# EAGLE board CT_schematic (EAGLE 7.6.0)

Size 100 x 80 mm. Coordinates in mm from the lower left corner, seen from the top.
Outline: 0,0 100,0 100,80 0,80 0,0
Copper layers (1*16): Top 0.035mm / dielectric 1.5mm / Bottom 0.035mm
Design rules "default": minimum track width 10mil, minimum drill 24mil, track to track 8mil, track to pad 8mil, pad to pad 8mil, via to via 8mil, smd to smd 8mil, copper to edge 40mil, drill to drill 8mil, minimum pad ring 10mil, minimum via ring 8mil, stop-mask expansion 4mil, vias tented up to drill 0mil, thermal gap 10mil

## Footprints (pad centres in the part's own frame; a part is rotated, then mirrored left to right if it is on the bottom)
C0603 = smd 0.8 x 0.8: 1 -0.762,0; 2 0.762,0
C0402 = smd 0.5 x 0.5: 1 -0.508,0; 2 0.508,0
C1206 = smd 1.3 x 1.6: 1 -1.524,0; 2 1.524,0
C0805 = smd 1.2 x 1.3: 1 -1.016,0; 2 1.016,0
2220 = smd 1.85 x 5.5: 1 -2.55,0; 2 2.55,0
C1210 = smd 1.2 x 2.5: 1 -1.524,0; 2 1.524,0
R0603 = smd 0.8 x 0.8: 1 -0.762,0; 2 0.762,0
EXV-9H = smd 3.505 x 1.676: 1 -2.857,0; 2 2.857,0
L0603 = smd 0.8 x 0.8: 1 -0.762,0; 2 0.762,0
WE-HCI_7030/7040/7050 = smd 2.5 x 3: 1 -2.45,0; 2 2.45,0
PJ-037B_PACKAGE = drill 3.7 square: 1 12,0 | drill 3.2 square: 2 6,0
TFBGA216 = smd 0.4 x 0.4: A1 -5.6,5.6; A2 -4.8,5.6; A3 -4,5.6; A4 -3.2,5.6; A5 -2.4,5.6; A6 -1.6,5.6; A7 -0.8,5.6; A8 0,5.6; A9 0.8,5.6; A10 1.6,5.6; A11 2.4,5.6; A12 3.2,5.6; A13 4,5.6; A14 4.8,5.6; A15 5.6,5.6; B1 -5.6,4.8; B2 -4.8,4.8; B3 -4,4.8; B4 -3.2,4.8; B5 -2.4,4.8; B6 -1.6,4.8; B7 -0.8,4.8; B8 0,4.8; B9 0.8,4.8; B10 1.6,4.8; B11 2.4,4.8; B12 3.2,4.8; B13 4,4.8; B14 4.8,4.8; B15 5.6,4.8; C1 -5.6,4; C2 -4.8,4; C3 -4,4; C4 -3.2,4; C5 -2.4,4; C6 -1.6,4; C7 -0.8,4; C8 0,4; C9 0.8,4; C10 1.6,4; C11 2.4,4; C12 3.2,4; C13 4,4; C14 4.8,4; C15 5.6,4; D1 -5.6,3.2; D2 -4.8,3.2; D3 -4,3.2; D4 -3.2,3.2; D5 -2.4,3.2; D6 -1.6,3.2; D7 -0.8,3.2; D8 0,3.2; D9 0.8,3.2; D10 1.6,3.2; D11 2.4,3.2; D12 3.2,3.2; D13 4,3.2; D14 4.8,3.2; D15 5.6,3.2; E1 -5.6,2.4; E2 -4.8,2.4; E3 -4,2.4; E4 -3.2,2.4; E5 -2.4,2.4; E6 -1.6,2.4; E7 -0.8,2.4; E8 0,2.4; E9 0.8,2.4; E10 1.6,2.4; E11 2.4,2.4; E12 3.2,2.4; E13 4,2.4; E14 4.8,2.4; E15 5.6,2.4; F1 -5.6,1.6; F2 -4.8,1.6; F3 -4,1.6; F4 -3.2,1.6; F5 -2.4,1.6; F6 -1.6,1.6; F7 -0.8,1.6; F8 0,1.6; F9 0.8,1.6; F10 1.6,1.6; F11 2.4,1.6; F12 3.2,1.6; F13 4,1.6; F14 4.8,1.6; F15 5.6,1.6; G1 -5.6,0.8; G2 -4.8,0.8; G3 -4,0.8; G4 -3.2,0.8; G5 -2.4,0.8; G6 -1.6,0.8; G10 1.6,0.8; G11 2.4,0.8; G12 3.2,0.8; G13 4,0.8; G14 4.8,0.8; G15 5.6,0.8; H1 -5.6,0; H2 -4.8,0; H3 -4,0; H4 -3.2,0; H5 -2.4,0; H6 -1.6,0; H10 1.6,0; H11 2.4,0; H12 3.2,0; H13 4,0; H14 4.8,0; H15 5.6,0; J1 -5.6,-0.8; J2 -4.8,-0.8; J3 -4,-0.8; J4 -3.2,-0.8; J5 -2.4,-0.8; J6 -1.6,-0.8; J10 1.6,-0.8; J11 2.4,-0.8; J12 3.2,-0.8; J13 4,-0.8; J14 4.8,-0.8; J15 5.6,-0.8; K1 -5.6,-1.6; K2 -4.8,-1.6; K3 -4,-1.6; K4 -3.2,-1.6; K5 -2.4,-1.6; K6 -1.6,-1.6; K7 -0.8,-1.6; K8 0,-1.6; K9 0.8,-1.6; K10 1.6,-1.6; K11 2.4,-1.6; K12 3.2,-1.6; K13 4,-1.6; K14 4.8,-1.6; K15 5.6,-1.6; L1 -5.6,-2.4; L2 -4.8,-2.4; L3 -4,-2.4; L4 -3.2,-2.4; L5 -2.4,-2.4; L6 -1.6,-2.4; L7 -0.8,-2.4; L8 0,-2.4; L9 0.8,-2.4; L10 1.6,-2.4; L11 2.4,-2.4; L12 3.2,-2.4; L13 4,-2.4; L14 4.8,-2.4; L15 5.6,-2.4; M1 -5.6,-3.2; M2 -4.8,-3.2; M3 -4,-3.2; M4 -3.2,-3.2; M5 -2.4,-3.2; M6 -1.6,-3.2; M7 -0.8,-3.2; M8 0,-3.2; M9 0.8,-3.2; M10 1.6,-3.2; M11 2.4,-3.2; M12 3.2,-3.2; M13 4,-3.2; M14 4.8,-3.2; M15 5.6,-3.2; N1 -5.6,-4; N2 -4.8,-4; N3 -4,-4; N4 -3.2,-4; N5 -2.4,-4; N6 -1.6,-4; N7 -0.8,-4; N8 0,-4; N9 0.8,-4; N10 1.6,-4; N11 2.4,-4; N12 3.2,-4; N13 4,-4; N14 4.8,-4; N15 5.6,-4; P1 -5.6,-4.8; P2 -4.8,-4.8; P3 -4,-4.8; P4 -3.2,-4.8; P5 -2.4,-4.8; P6 -1.6,-4.8; P7 -0.8,-4.8; P8 0,-4.8; P9 0.8,-4.8; P10 1.6,-4.8; P11 2.4,-4.8; P12 3.2,-4.8; P13 4,-4.8; P14 4.8,-4.8; P15 5.6,-4.8; R1 -5.6,-5.6; R2 -4.8,-5.6; R3 -4,-5.6; R4 -3.2,-5.6; R5 -2.4,-5.6; R6 -1.6,-5.6; R7 -0.8,-5.6; R8 0,-5.6; R9 0.8,-5.6; R10 1.6,-5.6; R11 2.4,-5.6; R12 3.2,-5.6; R13 4,-5.6; R14 4.8,-5.6; R15 5.6,-5.6
SOIC-8 = smd 1.6 x 0.6: 1 -2.7,1.905 | smd 1.55 x 0.6: 2 -2.7,0.635; 3 -2.7,-0.635; 4 -2.7,-1.905; 5 2.7,-1.905; 6 2.7,-0.635; 7 2.7,0.635; 8 2.7,1.905
IS61WV102416BLL-10MLI = smd 0.4 x 0.4: A1 0,0; A2 0.75,0; A3 1.5,0; A4 2.25,0; A5 3,0; A6 3.75,0; B1 0,-0.75; B2 0.75,-0.75; B3 1.5,-0.75; B4 2.25,-0.75; B5 3,-0.75; B6 3.75,-0.75; C1 0,-1.5; C2 0.75,-1.5; C3 1.5,-1.5; C4 2.25,-1.5; C5 3,-1.5; C6 3.75,-1.5; D1 0,-2.25; D2 0.75,-2.25; D3 1.5,-2.25; D4 2.25,-2.25; D5 3,-2.25; D6 3.75,-2.25; E1 0,-3; E2 0.75,-3; E3 1.5,-3; E4 2.25,-3; E5 3,-3; E6 3.75,-3; F1 0,-3.75; F2 0.75,-3.75; F3 1.5,-3.75; F4 2.25,-3.75; F5 3,-3.75; F6 3.75,-3.75; G1 0,-4.5; G2 0.75,-4.5; G3 1.5,-4.5; G4 2.25,-4.5; G5 3,-4.5; G6 3.75,-4.5; H1 0,-5.25; H2 0.75,-5.25; H3 1.5,-5.25; H4 2.25,-5.25; H5 3,-5.25; H6 3.75,-5.25
SOT-23-8 = smd 0.4 x 1.2: 1 -0.975,-1.3; 2 -0.325,-1.3; 3 0.325,-1.3; 4 0.975,-1.3; 5 0.975,1.3; 6 0.325,1.3; 7 -0.325,1.3; 8 -0.975,1.3
182-009-MALE = drill 1.194 pad 1.524 octagon: 1 -5.537,10.923; 2 -2.769,10.923; 3 0,10.923; 4 2.769,10.923; 5 5.537,10.923; 6 -4.153,8.08; 7 -1.384,8.08; 8 1.384,8.08; 9 4.153,8.08 | hole 3.048: -12.446,9.501; 12.446,9.501
ABS07-32.768KHZ-7-T = smd 1.1 x 2.4: 1 -2.5,0; 2 0,0
ASFL1 = smd 1.7 x 1.5: 1 -1.27,-1.1; 2 1.27,-1.1; 3 1.27,1.1; 4 -1.27,1.1
WSON-8 = smd 0.3 x 0.6: 1 -0.75,0; 2 0.05,0; 3 0.85,0; 4 1.65,0; 5 1.65,3.8; 6 0.85,3.8; 7 0.05,3.8; 8 -0.75,3.8 | smd 3 x 2.6: PAD 0.45,1.9
QFN-16_EP = smd 0.805 x 0.3: 1 -1.452,0.75; 2 -1.452,0.25; 3 -1.452,-0.25; 4 -1.452,-0.75; 9 1.452,-0.75; 10 1.452,-0.25; 11 1.452,0.25; 12 1.452,0.75 | smd 0.3 x 0.805: 5 -0.75,-1.452; 6 -0.25,-1.452; 7 0.25,-1.452; 8 0.75,-1.452; 13 0.75,1.452; 14 0.25,1.452; 15 -0.25,1.452; 16 -0.75,1.452 | smd 1.55 x 1.55: 17 0,0
QFN-38_UHF = smd 0.75 x 0.3: 1 -2.4,2.75; 2 -2.4,2.25; 3 -2.4,1.75; 4 -2.4,1.25; 6 -2.4,0.25; 7 -2.4,-0.25; 8 -2.4,-0.75; 9 -2.4,-1.25; 10 -2.4,-1.75; 11 -2.4,-2.25; 12 -2.4,-2.75; 20 2.4,-2.75; 21 2.4,-2.25; 22 2.4,-1.75; 23 2.4,-1.25; 24 2.4,-0.75; 25 2.4,-0.25; 26 2.4,0.25; 27 2.4,0.75; 28 2.4,1.25; 29 2.4,1.75; 30 2.4,2.25; 31 2.4,2.75 | smd 0.758 x 0.3: 5 -2.4,0.75 | smd 0.3 x 0.75: 13 -1.5,-3.4; 14 -1,-3.4; 15 -0.5,-3.4; 16 0,-3.4; 17 0.5,-3.4; 18 1,-3.4; 19 1.5,-3.4; 32 1.5,3.4; 33 1,3.4; 34 0.5,3.4; 35 0,3.4; 36 -0.5,3.4; 37 -1,3.4; 38 -1.5,3.4 | smd 3.2 x 5.2: 39 0,0
IRF8306MTRPBF = smd 0.9 x 1.85: 1 0,0; 2 0,-2.35; 6 6.4,0; 7 6.4,-2.35 | smd 0.75 x 0.75: 3 1.75,-1.175 | smd 1.45 x 0.87: 4 3.5,-0.565; 5 3.5,-1.785
SW_4-1437565-2 = smd 1.4 x 2.1: 1 -2.23,4.55; 2 -2.23,-4.55; 3 2.23,4.55; 4 2.23,-4.55
LGM67K-G1J2-24-Z = smd 0.8 x 1.4: A -2,0; C 0,0
NC7SZ125M5X = smd 1.3 x 0.7: 1 -1.3,0.95; 2 -1.3,0; 3 -1.3,-0.95; 4 1.3,-0.95; 5 1.3,0.95

## Placement (x,y rotation side)
C1  1e-06  [C0603]  -60.96,81.28 0 top  (outside the outline)
C2  1e-07  [C0603]  -64.77,81.28 0 top  (outside the outline)
C3  1e-07  [C0603]  -68.58,81.28 0 top  (outside the outline)
C4  1e-07  [C0603]  -72.39,81.28 0 top  (outside the outline)
C5  1e-07  [C0603]  -76.2,81.28 0 top  (outside the outline)
C6  1e-07  [C0603]  -80.01,81.28 0 top  (outside the outline)
C7  1e-07  [C0603]  -83.82,81.28 0 top  (outside the outline)
C8  1e-07  [C0603]  -87.63,81.28 0 top  (outside the outline)
C9  1e-07  [C0603]  -91.44,81.28 0 top  (outside the outline)
C10  1e-07  [C0603]  -15.24,86.36 0 top  (outside the outline)
C11  1e-07  [C0603]  -19.05,86.36 0 top  (outside the outline)
C12  1e-07  [C0603]  -22.86,86.36 0 top  (outside the outline)
C13  1e-07  [C0603]  -26.67,86.36 0 top  (outside the outline)
C14  1e-07  [C0603]  -30.48,86.36 0 top  (outside the outline)
C15  1e-07  [C0603]  -34.29,86.36 0 top  (outside the outline)
C16  1e-07  [C0603]  -38.1,86.36 0 top  (outside the outline)
C17  1e-07  [C0603]  -41.91,86.36 0 top  (outside the outline)
C18  1e-07  [C0603]  -45.72,86.36 0 top  (outside the outline)
C19  1e-07  [C0603]  -49.53,86.36 0 top  (outside the outline)
C20  1e-07  [C0603]  -53.34,86.36 0 top  (outside the outline)
C21  1e-07  [C0603]  -57.15,86.36 0 top  (outside the outline)
C22  4.7e-06  [C0603]  -49.53,81.28 0 top  (outside the outline)
C23  1e-08  [C0603]  -60.96,86.36 0 top  (outside the outline)
C24  1e-06  [C0603]  -64.77,86.36 0 top  (outside the outline)
C25  1e-07  [C0603]  -68.58,86.36 0 top  (outside the outline)
C26  1e-07  [C0603]  -72.39,86.36 0 top  (outside the outline)
C27  1e-07  [C0603]  -76.2,86.36 0 top  (outside the outline)
C28  1e-11  [C0402]  -57.15,91.44 0 top  (outside the outline)
C29  1e-11  [C0402]  -60.96,91.44 0 top  (outside the outline)
C30  1e-08  [C0402]  -64.77,91.44 0 top  (outside the outline)
C31  1e-07  [C0402]  -68.58,91.44 0 top  (outside the outline)
C32  2.2e-06  [C0603]  -53.34,81.28 0 top  (outside the outline)
C33  1e-07  [C0402]  -72.39,91.44 0 top  (outside the outline)
C34  1e-06  [C0603]  -80.01,86.36 0 top  (outside the outline)
C35  1e-06  [C0603]  -83.82,86.36 0 top  (outside the outline)
C36  1e-08  [C0402]  -76.2,91.44 0 top  (outside the outline)
C37  1e-08  [C0402]  -80.01,91.44 0 top  (outside the outline)
C38  1e-05  [C1206]  -86.36,62.23 0 top  (outside the outline)
C39  1e-05  [C0805]  -33.02,69.85 0 top  (outside the outline)
C40  1e-05  [C0805]  -38.1,69.85 0 top  (outside the outline)
C41  1e-06  [C0603]  -87.63,86.36 0 top  (outside the outline)
C42  1e-07  [C0402]  -83.82,91.44 0 top  (outside the outline)
C43  6.8e-05  [2220]  -76.2,45.72 0 top  (outside the outline)
C44  1e-06  [C0603]  -91.44,86.36 0 top  (outside the outline)
C45  1e-05  [C1210]  -80.01,63.5 0 top  (outside the outline)
C46  1e-08  [C0402]  -87.63,91.44 0 top  (outside the outline)
C47  1e-05  [C1206]  -16.51,71.12 0 top  (outside the outline)
C48  1e-05  [C0805]  -43.18,69.85 0 top  (outside the outline)
C49  1e-07  [C0402]  -91.44,91.44 0 top  (outside the outline)
C50  2.2e-06  [C0603]  -57.15,81.28 0 top  (outside the outline)
C51  2.45e-08  [R0603]  -15.24,76.2 0 top  (outside the outline)
C52  2.8258362168397e-09  [R0603]  -53.34,69.85 0 top  (outside the outline)
C53  7.105e-09  [R0603]  -58.42,69.85 0 top  (outside the outline)
C54  0.0001  [EXV-9H]  -26.67,63.5 0 top  (outside the outline)
C55  0.0001  [EXV-9H]  -38.1,63.5 0 top  (outside the outline)
C56  1e-08  [C0402]  -15.24,96.52 0 top  (outside the outline)
F1  240.0  [L0603]  -15.24,91.44 0 top  (outside the outline)
I1  3.3e-06  [WE-HCI_7030/7040/7050]  -50.8,27.94 0 top  (outside the outline)
J1  PJ-037B  [PJ-037B_PACKAGE]  -45.72,29.21 0 top  (outside the outline)
R2  1000.0  [R0603]  -19.05,91.44 0 top  (outside the outline)
R7  4700.0  [R0603]  -22.86,91.44 0 top  (outside the outline)
R8  10000.0  [R0603]  -20.32,76.2 0 top  (outside the outline)
R9  10000.0  [R0603]  -25.4,76.2 0 top  (outside the outline)
R10  10000.0  [R0603]  -30.48,76.2 0 top  (outside the outline)
R11  10000.0  [R0603]  -35.56,76.2 0 top  (outside the outline)
R12  10000.0  [R0603]  -40.64,76.2 0 top  (outside the outline)
R13  10000.0  [R0603]  -45.72,76.2 0 top  (outside the outline)
R14  10000.0  [R0603]  -50.8,76.2 0 top  (outside the outline)
R15  10000.0  [R0603]  -55.88,76.2 0 top  (outside the outline)
R16  10000.0  [R0603]  -60.96,76.2 0 top  (outside the outline)
R17  10000.0  [R0603]  -66.04,76.2 0 top  (outside the outline)
R18  120.0  [R0603]  -26.67,91.44 0 top  (outside the outline)
R19  120.0  [R0603]  -30.48,91.44 0 top  (outside the outline)
R20  100000.0  [R0603]  -63.5,69.85 0 top  (outside the outline)
R21  200.0  [R0603]  -34.29,91.44 0 top  (outside the outline)
R22  1000.0  [R0603]  -38.1,91.44 0 top  (outside the outline)
R23  20000.0  [R0603]  -71.12,76.2 0 top  (outside the outline)
R24  91000.0  [R0603]  -76.2,76.2 0 top  (outside the outline)
R25  300000.0  [R0603]  -68.58,69.85 0 top  (outside the outline)
R26  100000.0  [R0603]  -73.66,69.85 0 top  (outside the outline)
R27  300000.0  [R0603]  -78.74,69.85 0 top  (outside the outline)
R28  100000.0  [R0603]  -83.82,69.85 0 top  (outside the outline)
R29  100000.0  [R0603]  -88.9,69.85 0 top  (outside the outline)
R30  200.0  [R0603]  -41.91,91.44 0 top  (outside the outline)
R31  1000.0  [R0603]  -45.72,91.44 0 top  (outside the outline)
R32  10000.0  [R0603]  -81.28,76.2 0 top  (outside the outline)
R33  75000.0  [R0603]  -86.36,76.2 0 top  (outside the outline)
R34  10000.0  [R0603]  -91.44,76.2 0 top  (outside the outline)
R35  10000.0  [R0603]  -15.24,81.28 0 top  (outside the outline)
R36  95300.0  [R0603]  -20.32,81.28 0 top  (outside the outline)
R37  95300.0  [R0603]  -25.4,81.28 0 top  (outside the outline)
R38  10000.0  [R0603]  -30.48,81.28 0 top  (outside the outline)
R39  10000.0  [R0603]  -35.56,81.28 0 top  (outside the outline)
R40  10000.0  [R0603]  -40.64,81.28 0 top  (outside the outline)
R41  62000.0  [R0603]  -45.72,81.28 0 top  (outside the outline)
U1  STM32F479NGH6  [TFBGA216]  -24.13,31.75 0 top  (outside the outline)
U2  AT25M02-SSHD-T  [SOIC-8]  -24.13,45.72 0 top  (outside the outline)
U3  IS61WV102416BLL-10MLI  [IS61WV102416BLL-10MLI]  -81.28,30.48 0 top  (outside the outline)
U4  MAX3051EKA+T  [SOT-23-8]  -21.59,69.85 0 top  (outside the outline)
U5  182-009-113R531  [182-009-MALE]  -36.83,6.35 0 top  (outside the outline)
U6  MCP2562-E/SN  [SOIC-8]  -38.1,45.72 0 top  (outside the outline)
U7  182-009-113R531  [182-009-MALE]  -76.2,6.35 0 top  (outside the outline)
U8  ABS07-32.768KHZ-7-T  [ABS07-32.768KHZ-7-T]  -59.69,63.5 0 top  (outside the outline)
U9  ASFL1-25MHZ-NCS  [ASFL1]  -85.09,54.61 0 top  (outside the outline)
U10  LP3878SDX-ADJ/NOPB  [WSON-8]  -30.48,53.34 0 top  (outside the outline)
U11  LTC3601EUD#PBF  [QFN-16_EP]  -50.8,91.44 0 top  (outside the outline)
U12  LP2951ACSDX/NOPB  [WSON-8]  -68.58,53.34 0 top  (outside the outline)
U13  LP3878SDX-ADJ/NOPB  [WSON-8]  -50.8,53.34 0 top  (outside the outline)
U14  LTC2928CUHF#PBF  [QFN-38_UHF]  -16.51,63.5 0 top  (outside the outline)
U15  IRF8306MTRPbF  [IRF8306MTRPBF]  -55.88,46.99 0 top  (outside the outline)
U16  IRF8306MTRPbF  [IRF8306MTRPBF]  -71.12,46.99 0 top  (outside the outline)
U17  4-1437565-2  [SW_4-1437565-2]  -69.85,27.94 0 top  (outside the outline)
U18  Q65110A2395  [LGM67K-G1J2-24-Z]  -68.58,63.5 0 top  (outside the outline)
U19  nc7sz125m5x  [NC7SZ125M5X]  -26.67,69.85 0 top  (outside the outline)

## Library data of the parts
C1-C56 F1 I1 J1 R2 R7-R41 U1-U19 = circuit_tree

## Nets
CLK_CRYSTAL_U1_E1: C28.1 U1.E1 U8.1
CLK_CRYSTAL_U1_F1: C29.1 U1.F1 U8.2
CLK_U1_G1: U1.G1 U9.3
GND: C1.2 C2.2 C3.2 C4.2 C5.2 C6.2 C7.2 C8.2 C9.2 C10.2 C11.2 C12.2 C13.2 C14.2 C15.2 C16.2 C17.2 C18.2 C19.2 C20.2 C21.2 C22.2 C23.2 C24.2 C25.2 C26.2 C27.2 C28.2 C29.2 C30.2 C31.2 C32.2 C33.2 C34.2 C35.2 C36.2 C37.2 C38.2 C39.2 C40.2 C41.2 C43.1 C43.2 C44.2 C45.2 C46.2 C47.2 C48.2 C49.2 C50.2 C51.2 C52.2 C53.2 C54.2 C55.2 C56.2 J1.2 R2.2 R10.2 R22.2 R23.2 R25.2 R28.2 R31.2 R33.2 R36.2 R37.2 R38.2 R39.2 R40.2 U1.F2 U1.F6 U1.F7 U1.F8 U1.F9 U1.F10 U1.G6 U1.G10 U1.G12 U1.H6 U1.H10 U1.J6 U1.J10 U1.K6 U1.K7 U1.K8 U1.K9 U1.K10 U1.L6 U1.M1 U1.N1 U2.4 U3.D1 U3.E6 U4.2 U4.8 U5.5 U6.2 U6.8 U7.5 U9.2 U10.3 U10.PAD U11.1 U11.9 U11.17 U12.3 U12.4 U12.PAD U13.3 U13.PAD U14.8 U14.9 U14.10 U14.12 U14.13 U14.24 U14.25 U14.30 U14.32 U14.39 U18.C U19.1 U19.3
NET_U1_E5: R8.1 U1.E5
NET_U1_E6: R9.1 U1.E6
NET_U1_E11: C27.1 U1.E11
NET_U1_G13: U1.G13
NET_U1_J1: R7.1 U1.J1 U19.4
NET_U1_K12: U1.K12
NET_U1_L5: R11.1 U1.L5
NET_U1_M5: R10.1 U1.M5
NET_U1_R1: C23.1 C24.1 F1.1 U1.P1 U1.R1
NET_U1_R14: U18.A
NET_U1_R15: U17.3 U17.4
NET_U2_3: R12.1 U2.3
NET_U2_7: R14.1 U2.7
NET_U3_A2: R16.1 U3.A2
NET_U3_B5: R15.1 U3.B5
NET_U3_G5: R17.1 U3.G5
NET_U4_6: R18.2 U4.6
NET_U5_2: R18.2 U4.6 U5.2
NET_U5_3: R18.1 U4.7 U5.3
NET_U6_6: R19.2 U6.6
NET_U7_2: R19.2 U6.6 U7.2
NET_U7_3: R19.1 U6.7 U7.3
NET_U10_1: C37.1 U10.1
NET_U10_6: R21.2 R22.1 U10.6
NET_U10_8: R20.1 U10.8
NET_U11_3: C42.2 I1.1 U11.3 U11.4
NET_U11_6: C42.1 U11.6
NET_U11_7: C41.1 U11.7 U11.12
NET_U11_10: R25.1 U11.10
NET_U11_11: R23.1 R24.1 U11.11
NET_U11_14: U11.14
NET_U11_ATNET_3: I1.2 R24.2
NET_U12_5: R26.1 U12.5
NET_U12_7: R27.2 R28.1 U12.7
NET_U13_1: C46.1 U13.1
NET_U13_6: R30.2 R31.1 U13.6
NET_U13_8: R29.1 U13.8
NET_U14_3: R39.1 U14.3
NET_U14_6: R36.1 U14.6
NET_U14_7: R37.1 U14.7
NET_U14_16: R38.1 R41.1 U14.16
NET_U14_18: R35.1 U14.18
NET_U14_19: R34.1 U14.19 U14.20
NET_U14_21: R32.1 R33.1 U14.21 U19.2
NET_U14_22: C49.1 R32.2 R34.2 R35.2 U14.11 U14.22
NET_U14_26: C52.1 U14.26
NET_U14_27: C51.1 U14.27
NET_U14_28: C53.1 U14.28
NET_U14_38: R40.1 U14.38
NET_U15_3: U14.2 U15.3
NET_U16_3: U14.37 U16.3
NET_U17_1: R2.1 U17.1 U17.2
PROC_CAN1_RX: U1.A7 U6.4
PROC_CAN1_TX: U1.B4 U6.1
PROC_CAN2_RX: U1.L13 U4.4
PROC_CAN2_TX: U1.B6 U4.1
PROC_FMC_A0: U1.D2 U3.A3
PROC_FMC_A1: U1.E2 U3.A4
PROC_FMC_A2: U1.G2 U3.A5
PROC_FMC_A3: U1.H2 U3.B3
PROC_FMC_A4: U1.J2 U3.B4
PROC_FMC_A5: U1.K3 U3.C3
PROC_FMC_A6: U1.M6 U3.C4
PROC_FMC_A7: U1.N6 U3.D4
PROC_FMC_A8: U1.P6 U3.H2
PROC_FMC_A9: U1.M8 U3.H3
PROC_FMC_A10: U1.N7 U3.H4
PROC_FMC_A11: U1.M7 U3.H5
PROC_FMC_A12: U1.M13 U3.G3
PROC_FMC_A13: U1.M12 U3.G4
PROC_FMC_A14: U1.N12 U3.F3
PROC_FMC_A15: U1.N11 U3.F4
PROC_FMC_A16: U1.N10 U3.E4
PROC_FMC_A17: U1.M10 U3.D3
PROC_FMC_A18: U1.M11 U3.H1
PROC_FMC_A19: U1.A2 U3.G2
PROC_FMC_D0: U1.L12 U3.B6
PROC_FMC_D1: U1.K13 U3.C5
PROC_FMC_D2: U1.B12 U3.C6
PROC_FMC_D3: U1.C12 U3.D5
PROC_FMC_D4: U1.R8 U3.E5
PROC_FMC_D5: U1.N9 U3.F5
PROC_FMC_D6: U1.P9 U3.F6
PROC_FMC_D7: U1.R9 U3.G6
PROC_FMC_D8: U1.P10 U3.B1
PROC_FMC_D9: U1.R10 U3.C1
PROC_FMC_D10: U1.R12 U3.C2
PROC_FMC_D11: U1.P11 U3.D2
PROC_FMC_D12: U1.R11 U3.E2
PROC_FMC_D13: U1.L15 U3.F2
PROC_FMC_D14: U1.L14 U3.F1
PROC_FMC_D15: U1.K15 U3.G1
PROC_FMC_NBL0: U1.A6 U3.A1
PROC_SPI1_MISO: U2.2
PROC_SPI1_MOSI: U2.5
PROC_SPI1_NSS: R13.1 U2.1
PROC_SPI1_SCK: U2.6
VCC_7V9: C50.1 C54.1 C55.1 J1.1 R41.2 U14.23 U15.1 U15.2 U15.6 U15.7 U16.1 U16.2 U16.6 U16.7
VCC_S1_7V9: C38.1 C40.1 C44.1 R20.2 U10.4 U11.15 U11.16 U12.8 U15.4 U15.5
VCC_S2_7V9: C47.1 R29.2 U13.4 U16.4 U16.5
VCC_TIER1_1V2: C26.1 C39.1 R21.1 U1.L11 U10.5
VCC_TIER1_3V3: C1.1 C2.1 C3.1 C4.1 C5.1 C6.1 C7.1 C8.1 C9.1 C10.1 C11.1 C12.1 C13.1 C14.1 C15.1 C16.1 C17.1 C18.1 C19.1 C20.1 C21.1 C22.1 C25.1 C30.1 C31.1 C32.1 C33.1 C35.1 C36.1 C43.2 C56.1 F1.2 I1.2 R7.2 R8.2 R9.2 R11.2 R12.2 R13.2 R14.2 R15.2 R16.2 R17.2 R24.2 U1.C1 U1.E7 U1.E8 U1.E9 U1.E10 U1.F4 U1.F5 U1.F11 U1.G5 U1.G11 U1.H5 U1.H11 U1.J5 U1.J11 U1.K5 U1.K11 U1.L7 U1.L8 U1.L9 U1.L10 U2.8 U3.D6 U3.E1 U4.3 U6.5 U9.4 U11.8 U19.5
VCC_TIER1_5V0: C34.1 C45.1 R26.2 R27.1 U6.3 U12.1
VCC_TIER2_1V2: C48.1 R30.1 U13.5

## Tracks (layer width: path | path; a pad name or v marks a point on that pad's centre or on a via)
CLK_CRYSTAL_U1_E1  (2 unrouted)
CLK_CRYSTAL_U1_F1  (2 unrouted)
CLK_U1_G1  (1 unrouted)
GND  (123 unrouted)
NET_U1_E5  (1 unrouted)
NET_U1_E6  (1 unrouted)
NET_U1_E11  (1 unrouted)
NET_U1_J1  (2 unrouted)
NET_U1_L5  (1 unrouted)
NET_U1_M5  (1 unrouted)
NET_U1_R1  (4 unrouted)
NET_U1_R15  (1 unrouted)
NET_U2_3  (1 unrouted)
NET_U2_7  (1 unrouted)
NET_U3_A2  (1 unrouted)
NET_U3_B5  (1 unrouted)
NET_U3_G5  (1 unrouted)
NET_U4_6  (1 unrouted)
NET_U5_2  (2 unrouted)
NET_U5_3  (2 unrouted)
NET_U6_6  (1 unrouted)
NET_U7_2  (2 unrouted)
NET_U7_3  (2 unrouted)
NET_U10_1  (1 unrouted)
NET_U10_6  (2 unrouted)
NET_U10_8  (1 unrouted)
NET_U11_3  (3 unrouted)
NET_U11_6  (1 unrouted)
NET_U11_7  (2 unrouted)
NET_U11_10  (1 unrouted)
NET_U11_11  (2 unrouted)
NET_U11_ATNET_3  (1 unrouted)
NET_U12_5  (1 unrouted)
NET_U12_7  (2 unrouted)
NET_U13_1  (1 unrouted)
NET_U13_6  (2 unrouted)
NET_U13_8  (1 unrouted)
NET_U14_3  (1 unrouted)
NET_U14_6  (1 unrouted)
NET_U14_7  (1 unrouted)
NET_U14_16  (2 unrouted)
NET_U14_18  (1 unrouted)
NET_U14_19  (2 unrouted)
NET_U14_21  (3 unrouted)
NET_U14_22  (5 unrouted)
NET_U14_26  (1 unrouted)
NET_U14_27  (1 unrouted)
NET_U14_28  (1 unrouted)
NET_U14_38  (1 unrouted)
NET_U15_3  (1 unrouted)
NET_U16_3  (1 unrouted)
NET_U17_1  (2 unrouted)
PROC_CAN1_RX  (1 unrouted)
PROC_CAN1_TX  (1 unrouted)
PROC_CAN2_RX  (1 unrouted)
PROC_CAN2_TX  (1 unrouted)
PROC_FMC_A0  (1 unrouted)
PROC_FMC_A1  (1 unrouted)
PROC_FMC_A2  (1 unrouted)
PROC_FMC_A3  (1 unrouted)
PROC_FMC_A4  (1 unrouted)
PROC_FMC_A5  (1 unrouted)
PROC_FMC_A6  (1 unrouted)
PROC_FMC_A7  (1 unrouted)
PROC_FMC_A8  (1 unrouted)
PROC_FMC_A9  (1 unrouted)
PROC_FMC_A10  (1 unrouted)
PROC_FMC_A11  (1 unrouted)
PROC_FMC_A12  (1 unrouted)
PROC_FMC_A13  (1 unrouted)
PROC_FMC_A14  (1 unrouted)
PROC_FMC_A15  (1 unrouted)
PROC_FMC_A16  (1 unrouted)
PROC_FMC_A17  (1 unrouted)
PROC_FMC_A18  (1 unrouted)
PROC_FMC_A19  (1 unrouted)
PROC_FMC_D0  (1 unrouted)
PROC_FMC_D1  (1 unrouted)
PROC_FMC_D2  (1 unrouted)
PROC_FMC_D3  (1 unrouted)
PROC_FMC_D4  (1 unrouted)
PROC_FMC_D5  (1 unrouted)
PROC_FMC_D6  (1 unrouted)
PROC_FMC_D7  (1 unrouted)
PROC_FMC_D8  (1 unrouted)
PROC_FMC_D9  (1 unrouted)
PROC_FMC_D10  (1 unrouted)
PROC_FMC_D11  (1 unrouted)
PROC_FMC_D12  (1 unrouted)
PROC_FMC_D13  (1 unrouted)
PROC_FMC_D14  (1 unrouted)
PROC_FMC_D15  (1 unrouted)
PROC_FMC_NBL0  (1 unrouted)
PROC_SPI1_NSS  (1 unrouted)
VCC_7V9  (13 unrouted)
VCC_S1_7V9  (9 unrouted)
VCC_S2_7V9  (4 unrouted)
VCC_TIER1_1V2  (4 unrouted)
VCC_TIER1_3V3  (71 unrouted)
VCC_TIER1_5V0  (5 unrouted)
VCC_TIER2_1V2  (2 unrouted)